# Altium PCB FPC.PcbDoc
Units mm, origin at the board's own origin, x right, y up, seen from the top; angles counter-clockwise.
Board outline 60 x 30 mm, 2 copper layers (Top Layer, Bottom Layer), stack 0.465 mm thick; 1 components, 0 nets, 26 pads, 0 vias.
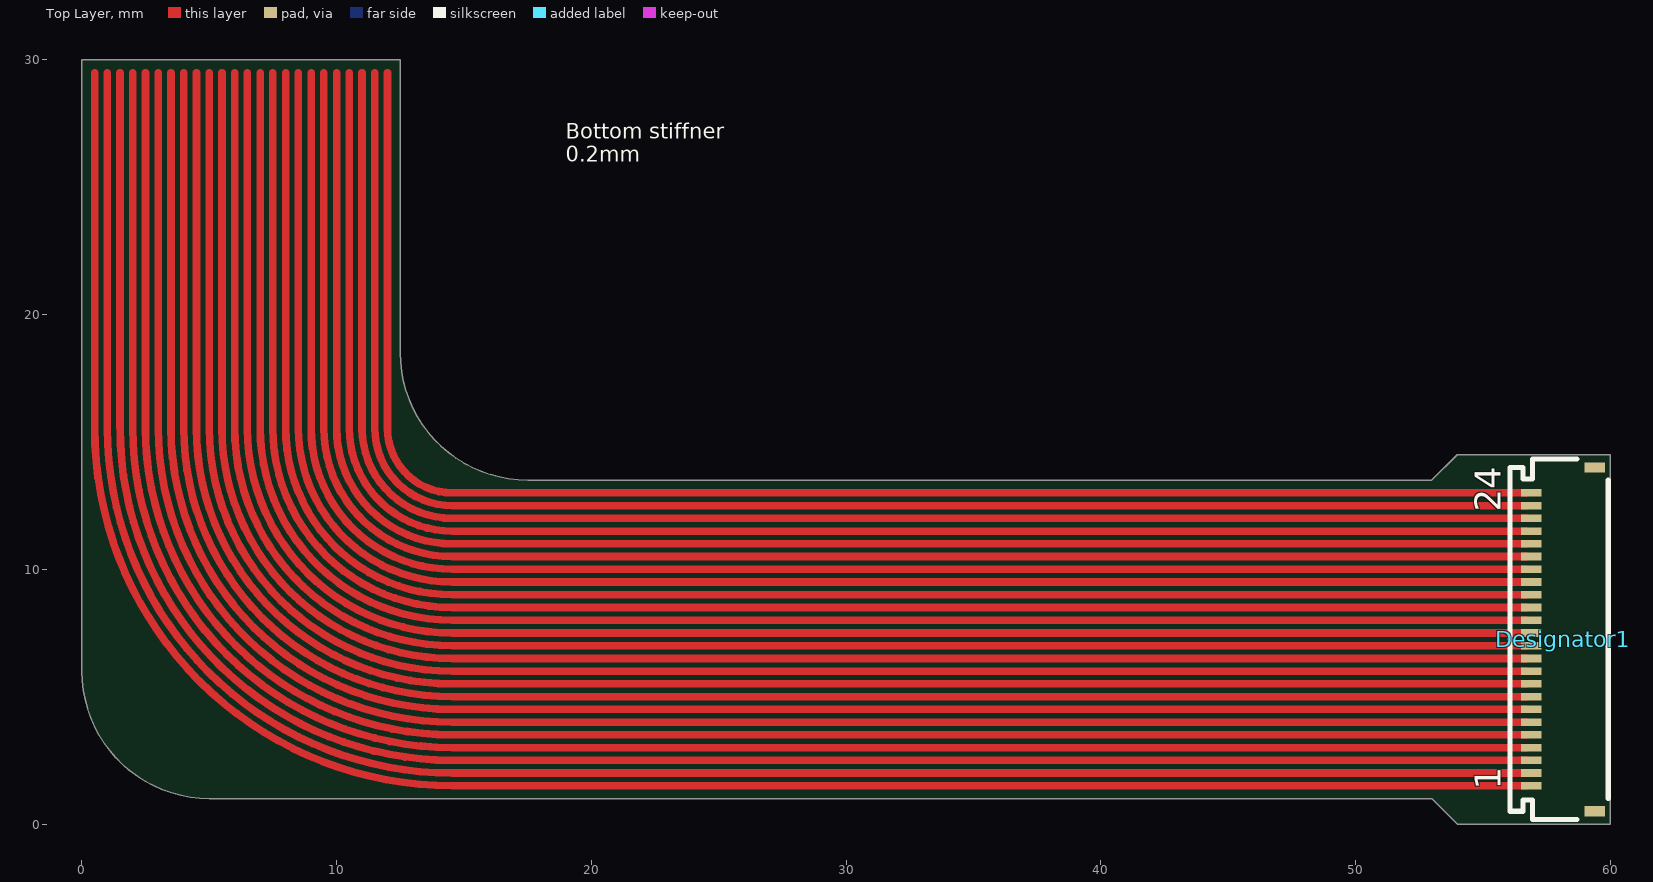
[diagram p0: Top Layer view]
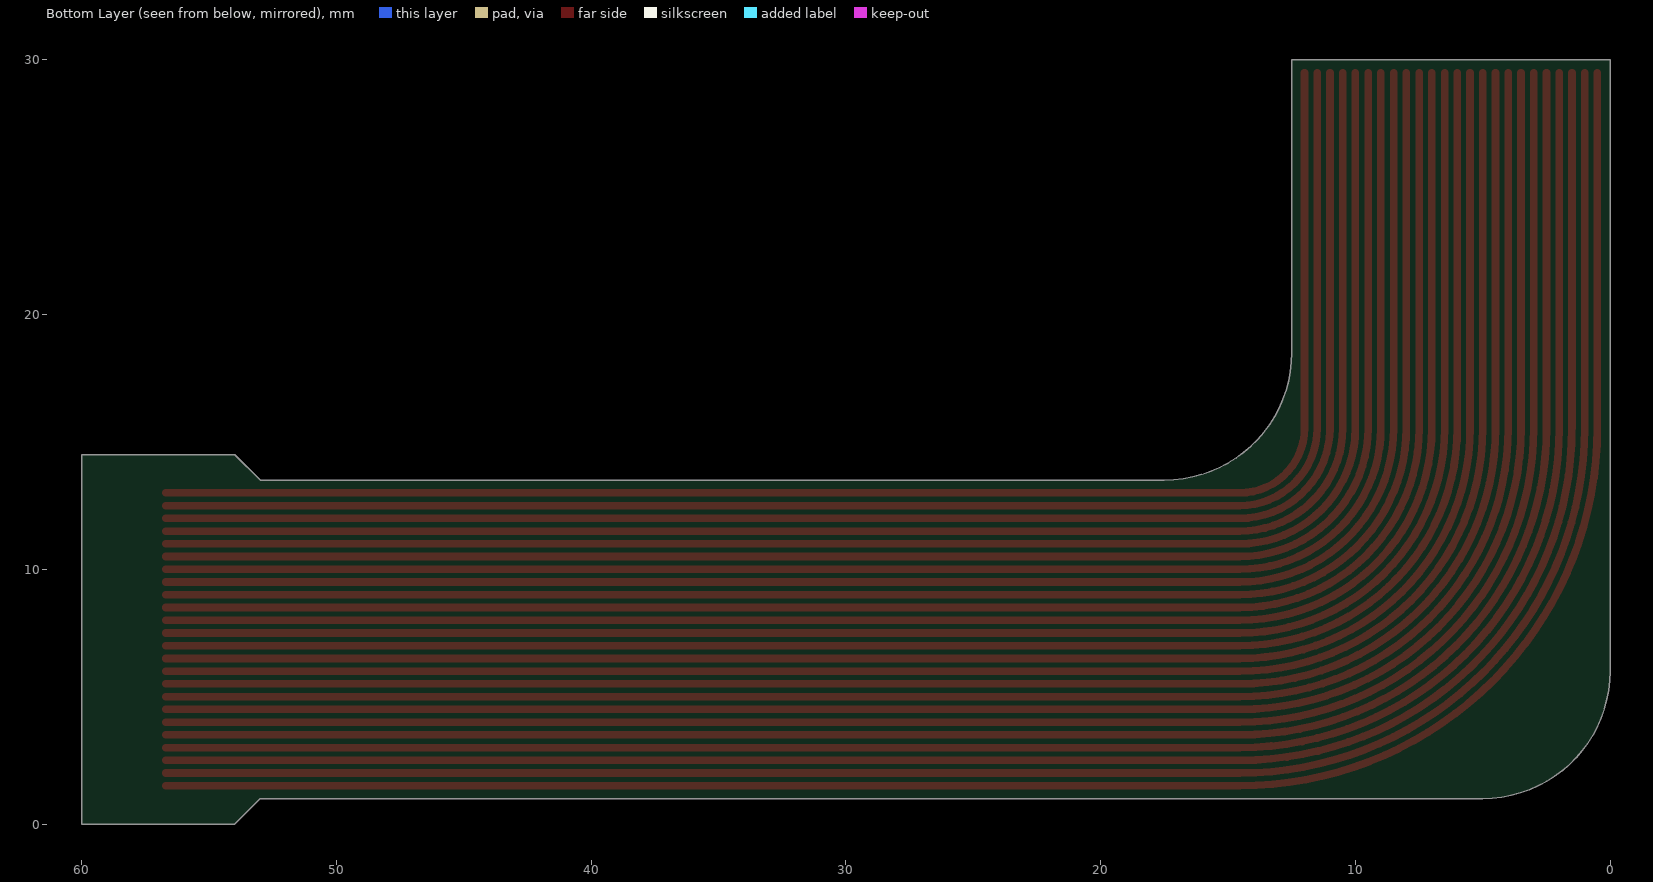
[diagram p1: Bottom Layer view, seen from below]

## Layer stack, top to bottom
Stiffener 1: core 0.15, Core-009, Dk 4.5
Board Layer Stack Top Coverlay: solder mask 0.0125, FC-001, Dk 4
Adhesive 3: prepreg 0.015, PP-006, Dk 4.1
Top Layer: signal copper 0.035
Adhesive 1: core 0.02, Composite dielectric, Dk 4.1
Dielectric 1: core 0.025, Composite dielectric, Dk 4.1
Adhesive 2: core 0.02, Composite dielectric, Dk 4.1
Bottom Layer: signal copper 0.035
Adhesive 4: prepreg 0.015, PP-006, Dk 4.1
Board Layer Stack Bottom Coverlay: solder mask 0.0125, FC-001, Dk 4
Stiffener 2: core 0.15, Core-009, Dk 4.5

## Board outline
53,1 54,0 60,0 60,14.5 54,14.5 53,13.5 17.5,13.5 cw(c17.5,18.5) 12.5,18.5 12.5,27 12.5,30 0,30 0,27 0,6 ccw(c5,6) 5,1
board region "Layer Stack Region 2": 0,27 12.5,27 12.5,25 0,25
board region "Default Layer Stack Region": 54,0 60,0 60,14.5 54,14.5 53,13.5 17.5,13.5 17.173,13.511 16.525,13.596 15.893,13.765 15.289,14.016 14.722,14.343 14.203,14.741 13.741,15.203 13.343,15.722 13.016,16.289 12.765,16.893 12.596,17.525 12.511,18.173 12.5,18.5 12.5,25 0,25 0,6 0,5.672 0.086,5.022 0.255,4.389 0.506,3.784 0.834,3.216 1.233,2.696 1.696,2.233 2.216,1.834 2.784,1.506 3.389,1.255 4.022,1.086 4.672,1 5,1 53,1
board region "Layer Stack Region 1": 0,27 12.5,27 12.5,30 0,30

## Design rules (kind name [scope] priority, off if disabled: settings)
Clearance FPC05 [All] p1: gap=0.2 ignorepadtopadclearanceinfootprint=FALSE except(0: Arc-Hole Track-Hole SMDPad-Hole THPad-Hole Via-Hole Fill-Hole Poly-Hole Region-Hole Text-Hole; 0.254: THPad-THPad THPad-Via THPad-Fill THPad-Poly THPad-Region THPad-Text Via-Via Via-Fill Via-Poly Via-Region Via-Text Text-Text)
Clearance [All] p2: gap=0.254 ignorepadtopadclearanceinfootprint=FALSE except(0: Arc-Hole Track-Hole SMDPad-Hole THPad-Hole Via-Hole Fill-Hole Poly-Hole Region-Hole Text-Hole)
DiffPairsRouting [All] p1: maxlimit=0.254 minlimit=0.254 mostfreqgap=0.254 substack1={57B119D8-EAD1-4BB7-B044-4FB3EC91E598} toplayer_{57b119d8-ead1-4bb7-b044-4fb3ec91e598}_minwidth=0.381 toplayer_{57b119d8-ead1-4bb7-b044-4fb3ec91e598}_maxwidth=0.381 toplayer_{57b119d8-ead1-4bb7-b044-4fb3ec91e598}_prefwidth=0.381 bottomlayer_{57b119d8-ead1-4bb7-b044-4fb3ec91e598}_minwidth=0.381 bottomlayer_{57b119d8-ead1-4bb7-b044-4fb3ec91e598}_maxwidth=0.381 bottomlayer_{57b119d8-ead1-4bb7-b044-4fb3ec91e598}_prefwidth=0.381 toplayer_minwidth=0.381 toplayer_maxwidth=0.381 toplayer_prefwidth=0.381 bottomlayer_minwidth=0.381 bottomlayer_maxwidth=0.381 bottomlayer_prefwidth=0.381 substack2={ED13B4B9-F2F9-42C8-A5BB-2D08F3ACFC27} toplayer_{ed13b4b9-f2f9-42c8-a5bb-2d08f3acfc27}_minwidth=0.381 toplayer_{ed13b4b9-f2f9-42c8-a5bb-2d08f3acfc27}_maxwidth=0.381 toplayer_{ed13b4b9-f2f9-42c8-a5bb-2d08f3acfc27}_prefwidth=0.381 bottomlayer_{ed13b4b9-f2f9-42c8-a5bb-2d08f3acfc27}_minwidth=0.381 bottomlayer_{ed13b4b9-f2f9-42c8-a5bb-2d08f3acfc27}_maxwidth=0.381 bottomlayer_{ed13b4b9-f2f9-42c8-a5bb-2d08f3acfc27}_prefwidth=0.381 substack3={B200E4FE-5203-4908-9D9C-473F7781E163} toplayer_{b200e4fe-5203-4908-9d9c-473f7781e163}_minwidth=0.381 toplayer_{b200e4fe-5203-4908-9d9c-473f7781e163}_maxwidth=0.381 toplayer_{b200e4fe-5203-4908-9d9c-473f7781e163}_prefwidth=0.381 bottomlayer_{b200e4fe-5203-4908-9d9c-473f7781e163}_minwidth=0.381 bottomlayer_{b200e4fe-5203-4908-9d9c-473f7781e163}_maxwidth=0.381 bottomlayer_{b200e4fe-5203-4908-9d9c-473f7781e163}_prefwidth=0.381 substack4={171F4D23-E828-4288-B839-C1FB1D0CF43D} toplayer_{171f4d23-e828-4288-b839-c1fb1d0cf43d}_minwidth=0.381 toplayer_{171f4d23-e828-4288-b839-c1fb1d0cf43d}_maxwidth=0.381 toplayer_{171f4d23-e828-4288-b839-c1fb1d0cf43d}_prefwidth=0.381 bottomlayer_{171f4d23-e828-4288-b839-c1fb1d0cf43d}_minwidth=0.381 bottomlayer_{171f4d23-e828-4288-b839-c1fb1d0cf43d}_maxwidth=0.381 bottomlayer_{171f4d23-e828-4288-b839-c1fb1d0cf43d}_prefwidth=0.381 substack5={8320B208-B58A-4B09-8CEB-068E582CCD38} toplayer_{8320b208-b58a-4b09-8ceb-068e582ccd38}_minwidth=0.381 toplayer_{8320b208-b58a-4b09-8ceb-068e582ccd38}_maxwidth=0.381 toplayer_{8320b208-b58a-4b09-8ceb-068e582ccd38}_prefwidth=0.381 bottomlayer_{8320b208-b58a-4b09-8ceb-068e582ccd38}_minwidth=0.381 bottomlayer_{8320b208-b58a-4b09-8ceb-068e582ccd38}_maxwidth=0.381 bottomlayer_{8320b208-b58a-4b09-8ceb-068e582ccd38}_prefwidth=0.381 maxuncoupledlength=12.7
PolygonConnect [All] p1: connectstyle=Relief reliefconductorwidth=0.254 reliefentries=4 polygonreliefangle="90 Angle" airgapwidth=0.254
RoutingVias [All] p1: holewidth=0.711 width=1.27 viastyle="Through Hole" minholewidth=0.711 minwidth=1.27 maxholewidth=0.711 maxwidth=1.27
SolderMaskExpansion [All] p1: expansion=0.102 istentingtop=FALSE
Width [All] p1: maxlimit=0.3 minlimit=0.3 preferedwidth=0.3 substack1={57B119D8-EAD1-4BB7-B044-4FB3EC91E598} substack2={ED13B4B9-F2F9-42C8-A5BB-2D08F3ACFC27} substack3={B200E4FE-5203-4908-9D9C-473F7781E163} substack4={171F4D23-E828-4288-B839-C1FB1D0CF43D} substack5={8320B208-B58A-4B09-8CEB-068E582CCD38}
29 further rules are at their usual default settings.

## Components (designator, comment, footprint, x,y, rotation, side; value= is the part's Value field where it differs from the comment)
Designator1 "Comment" 687124182122 58,7.25 r90 top

## Footprints (in the part's own frame and the unit in brackets; to place one, negate y for a bottom-side part, rotate by r counter-clockwise, add the part's x,y. Pads: shape width x height; smd on the part's side, far side on the other; paste and mask are expansions set on the pad)
687124182122 [mm] "ZIF Connectors, Horizontal, Dual Contact Back Locking, pitch 0.5mm, 24p"
  rect 0.3x0.8 smd: 1(-5.75,1.1) 2(-5.25,1.1) 3(-4.75,1.1) 4(-4.25,1.1) 5(-3.75,1.1) 6(-3.25,1.1) 7(-2.75,1.1) 8(-2.25,1.1) 9(-1.75,1.1) 10(-1.25,1.1) 11(-0.75,1.1) 12(-0.25,1.1) 13(0.25,1.1) 14(0.75,1.1) 15(1.25,1.1) 16(1.75,1.1) 17(2.25,1.1) 18(2.75,1.1) 19(3.25,1.1) 20(3.75,1.1) 21(4.25,1.1) 22(4.75,1.1) 23(5.25,1.1) 24(5.75,1.1)
  rect 0.4x0.8 smd: MP1(-6.75,-1.4) MP2(6.75,-1.4)
  silkscreen extent -7.07,-1.92 7.08,1.92, body extent -7,-1.85 7,1.85, height 0.98

## Nets (pads, with @x,y where several pads share a name; then routed paths per layer and width w, separated by ;. In a path a pad name is that pad's centre, name@x,y a point inside that pad or via, vN(x,y) a via of type N, cw(c..) or ccw(c..) an arc to the next point about the centre after c; other vN are vias at no path point)
pads on no net: Designator1.1 Designator1.2 Designator1.3 Designator1.4 Designator1.5 Designator1.6 Designator1.7 Designator1.8 Designator1.9 Designator1.10 Designator1.11 Designator1.12 Designator1.13 Designator1.14 Designator1.15 Designator1.16 Designator1.17 Designator1.18 Designator1.19 Designator1.20 Designator1.21 Designator1.22 Designator1.23 Designator1.24 Designator1.MP1 Designator1.MP2
copper on no net: | length 1659.4
  Top Layer w0.3: 0.5,29.5 0.5,15.54 ccw(c14.54,15.54) 14.54,1.5 19.5,1.5 53,1.5 56.7,1.5 ; 1,29.5 1,15.54 ccw(c14.54,15.54) 14.54,2 19.5,2 53,2 56.7,2 ; 1.5,29.5 1.5,15.54 ccw(c14.54,15.54) 14.54,2.5 19.5,2.5 53,2.5 56.7,2.5 ; 2,29.5 2,15.54 ccw(c14.54,15.54) 14.54,3 19.5,3 53,3 56.7,3 ; 2.5,29.5 2.5,15.54 ccw(c14.54,15.54) 14.54,3.5 19.5,3.5 53,3.5 56.7,3.5 ; 3,29.5 3,15.54 ccw(c14.54,15.54) 14.54,4 19.5,4 53,4 56.7,4 ; 3.5,29.5 3.5,15.54 ccw(c14.54,15.54) 14.54,4.5 19.5,4.5 53,4.5 56.7,4.5 ; 4,29.5 4,15.54 ccw(c14.54,15.54) 14.54,5 19.5,5 53,5 56.7,5 ; 4.5,29.5 4.5,15.54 ccw(c14.54,15.54) 14.54,5.5 19.5,5.5 53,5.5 56.7,5.5 ; 5,29.5 5,15.54 ccw(c14.54,15.54) 14.54,6 19.5,6 53,6 56.7,6 ; 5.5,29.5 5.5,15.54 ccw(c14.54,15.54) 14.54,6.5 19.5,6.5 53,6.5 56.7,6.5 ; 6,29.5 6,15.54 ccw(c14.54,15.54) 14.54,7 19.5,7 53,7 56.7,7 ; 6.5,29.5 6.5,15.54 ccw(c14.54,15.54) 14.54,7.5 19.5,7.5 53,7.5 56.7,7.5 ; 7,29.5 7,15.54 ccw(c14.54,15.54) 14.54,8 19.5,8 53,8 56.7,8 ; 7.5,29.5 7.5,15.54 ccw(c14.54,15.54) 14.54,8.5 19.5,8.5 53,8.5 56.7,8.5 ; 8,29.5 8,15.54 ccw(c14.54,15.54) 14.54,9 19.5,9 53,9 56.7,9 ; 8.5,29.5 8.5,15.54 ccw(c14.54,15.54) 14.54,9.5 19.5,9.5 53,9.5 56.7,9.5 ; 9,29.5 9,15.54 ccw(c14.54,15.54) 14.54,10 19.5,10 53,10 56.7,10 ; 9.5,29.5 9.5,15.54 ccw(c14.54,15.54) 14.54,10.5 19.5,10.5 53,10.5 56.7,10.5 ; 10,29.5 10,15.54 ccw(c14.54,15.54) 14.54,11 19.5,11 53,11 56.7,11 ; 10.5,29.5 10.5,15.54 ccw(c14.54,15.54) 14.54,11.5 19.5,11.5 53,11.5 56.7,11.5 ; 11,29.5 11,15.54 ccw(c14.54,15.54) 14.54,12 19.5,12 53,12 56.7,12 ; 11.5,29.5 11.5,15.54 ccw(c14.54,15.54) 14.54,12.5 19.5,12.5 53,12.5 56.7,12.5 ; 12,29.5 12,15.54 ccw(c14.54,15.54) 14.54,13 19.5,13 53,13 56.7,13

## Polygon pours and split planes (outlines as drawn)
no net on Layer0 "Default Coverlay 4 Top" (split plane): 0,27 12.5,27 12.5,25 0,25
no net on Layer0 "Default Coverlay 4 Bottom" (split plane): 0,27 12.5,27 12.5,25 0,25
no net on Layer0 "Default Coverlay 2 Top" (split plane): 0,25 12.5,25 12.5,18.5 12.511,18.173 12.596,17.525 12.765,16.893 13.016,16.289 13.343,15.722 13.741,15.203 14.203,14.741 14.722,14.343 15.289,14.016 15.893,13.765 16.525,13.596 17.173,13.511 17.5,13.5 53,13.5 54,14.5 60,14.5 60,0 54,0 53,1 5,1 4.672,1 4.022,1.086 3.389,1.255 2.784,1.506 2.216,1.834 1.696,2.233 1.233,2.696 0.834,3.216 0.506,3.784 0.255,4.389 0.086,5.022 0,5.672 0,6
no net on Layer0 "Default Coverlay 2 Bottom" (split plane): 0,25 12.5,25 12.5,18.5 12.511,18.173 12.596,17.525 12.765,16.893 13.016,16.289 13.343,15.722 13.741,15.203 14.203,14.741 14.722,14.343 15.289,14.016 15.893,13.765 16.525,13.596 17.173,13.511 17.5,13.5 53,13.5 54,14.5 60,14.5 60,0 54,0 53,1 5,1 4.672,1 4.022,1.086 3.389,1.255 2.784,1.506 2.216,1.834 1.696,2.233 1.233,2.696 0.834,3.216 0.506,3.784 0.255,4.389 0.086,5.022 0,5.672 0,6

## Silkscreen, mask and mechanical layers (free items; w line width, h text height)
Top Overlay:
  text "Bottom stiffner  / 0.2mm" at 19,26 h0.6
Board Layer Stack Top Coverlay:
  rectangle: 0,27 12.5,30
Mechanical 1:
  lines w0.01: 0,25 12.5,25 ; 0,27 12.5,27 ; 0,6 ccw(c5,6) 5,1 53,1 54,0 60,0 60,14.5 54,14.5 53,13.5 17.5,13.5 cw(c17.5,18.5) 12.5,18.5 12.5,30 0,30 0,6
Mechanical 2:
  lines w0.01: 27.999,1 27.999,13.5 ; 32.083,1 32.083,13.5 ; 38.864,1 38.864,13.5 ; 40.808,1 40.808,13.5 ; 40.858,1 40.858,13.5 ; 43.235,1 43.235,13.5 ; 49.085,1 49.085,13.5 ; 52.051,1 52.051,13.5 ; 52.151,1 52.151,13.5 ; 55.392,1 55.392,13.5
Mechanical 3:
  lines w0.01: 30.041,1 30.041,13.5 ; 39.836,1 39.836,13.5 ; 42.047,1 42.047,13.5 ; 50.568,1 50.568,13.5 ; 53.771,1 53.771,13.5
Mechanical 4:
  lines w0.01: 0,6 ccw(c5,6) 5,1 53,1 54,0 60,0 60,14.5 54,14.5 53,13.5 17.5,13.5 cw(c17.5,18.5) 12.5,18.5 12.5,30 0,30 0,6

## Dimensions
12.5,30 to 12.5,25 on Top Overlay

## Text inside footprints (layer, text, board x,y; h text height)
Designator1: Top Overlay "1" at 55.7,1.35 h1.02 r90; Top Overlay "24" at 55.7,12.25 h1.02 r90